# Altium PCB amplifier.PcbDoc
Units mm, origin at the board's own origin, x right, y up, seen from the top; angles counter-clockwise.
Board outline 75 x 50 mm, 2 copper layers (Top Layer, Bottom Layer), stack 1.671 mm thick; 10 components, 10 nets, 28 pads, 7 vias.
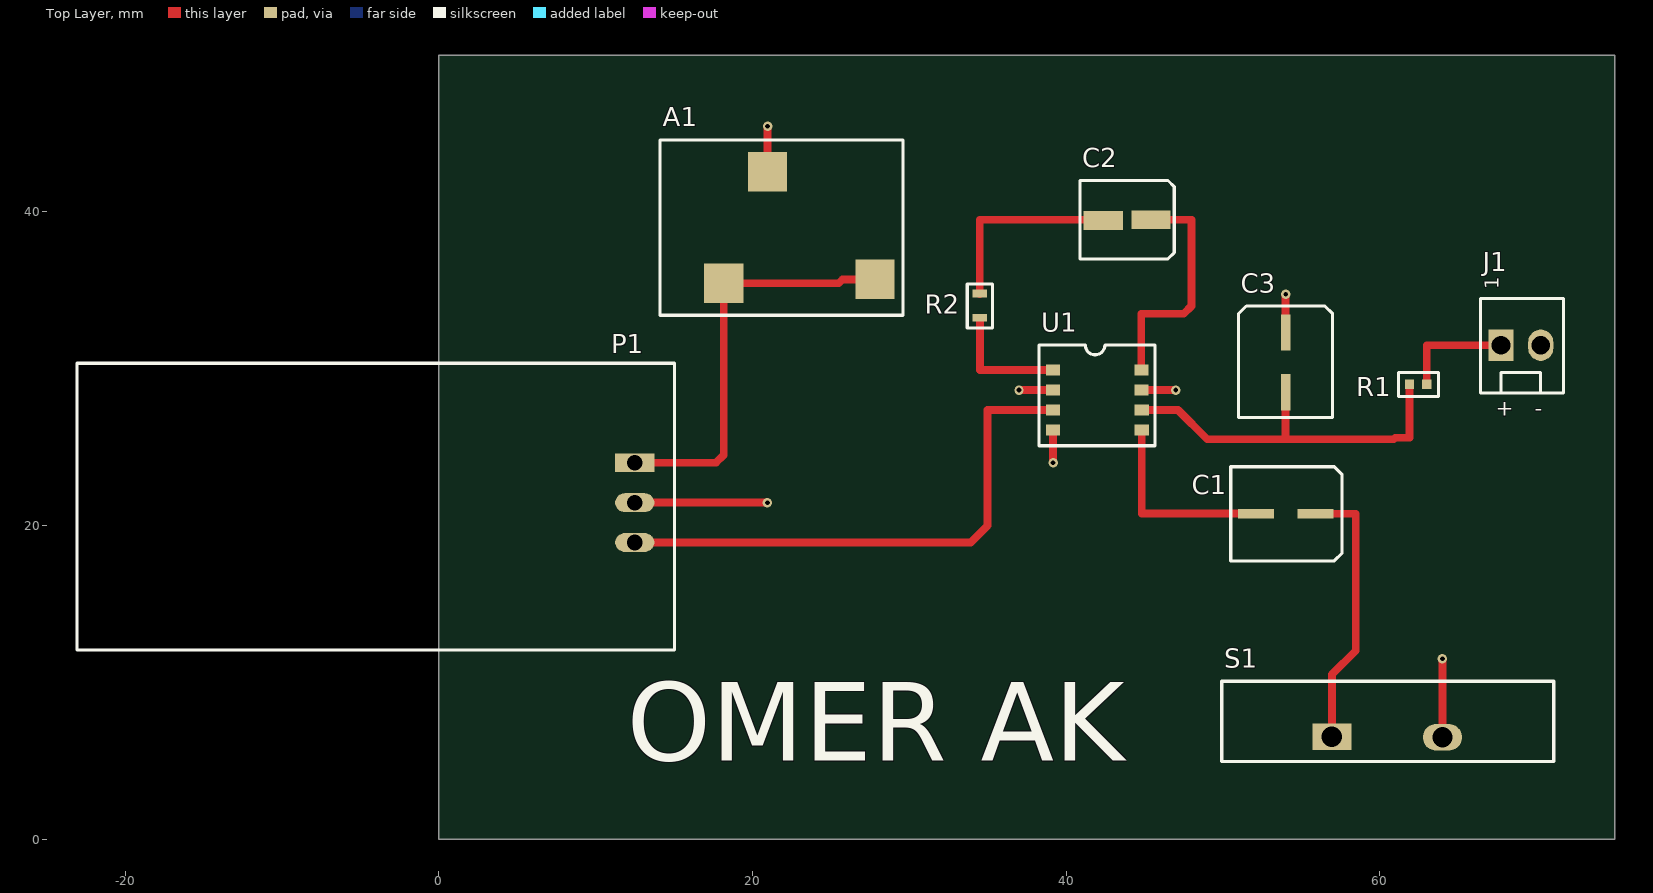
[diagram p0: Top Layer view]
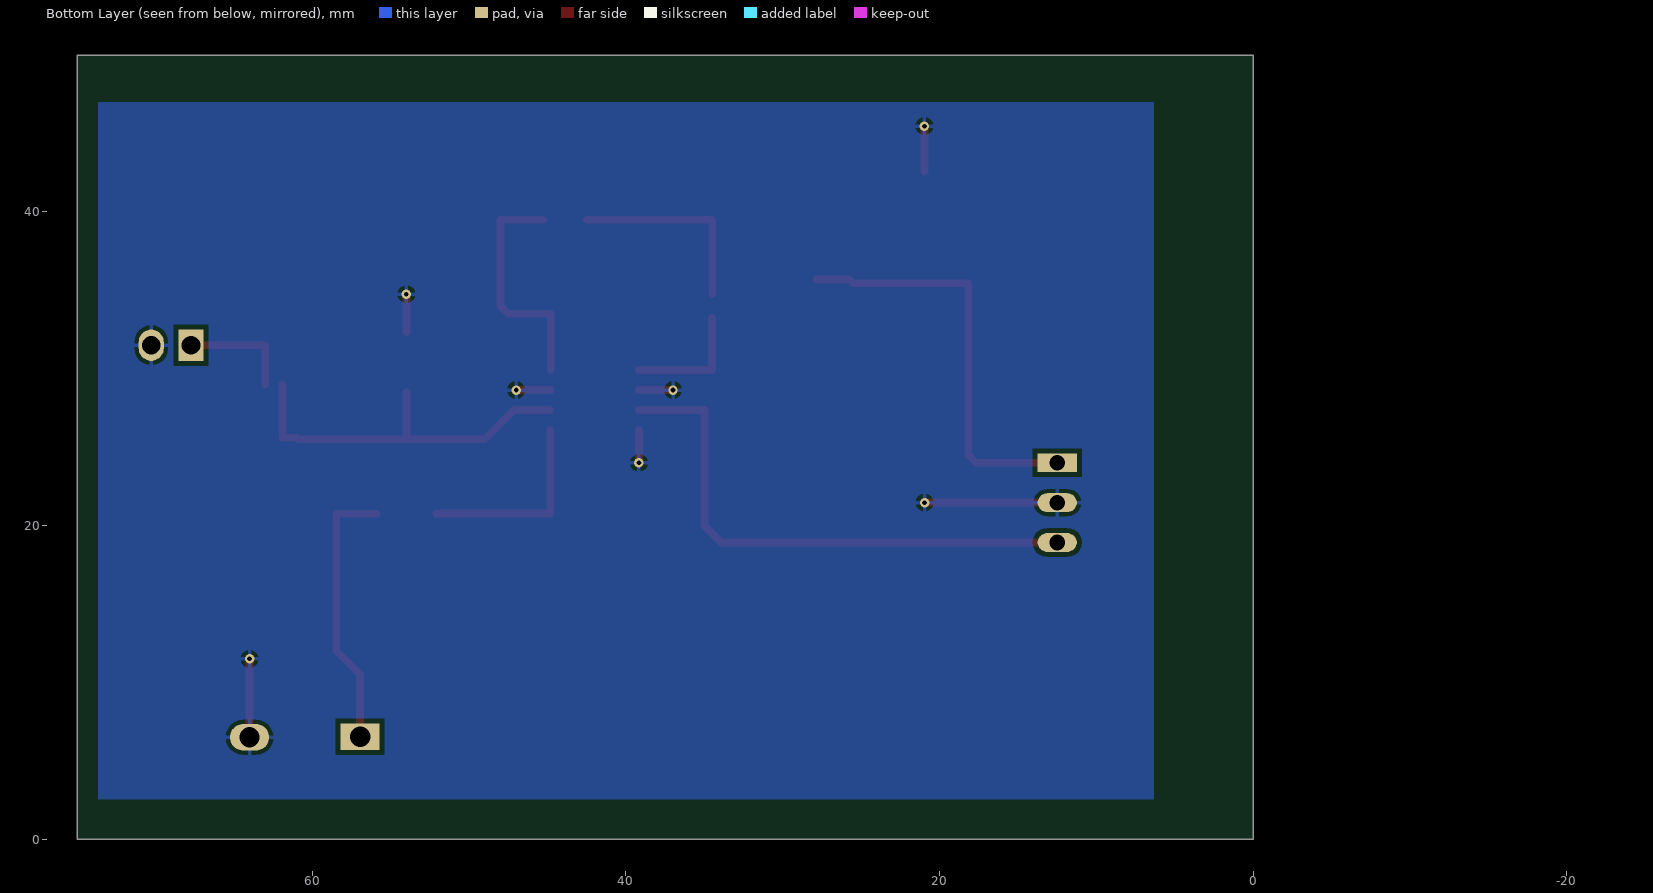
[diagram p1: Bottom Layer view, seen from below]
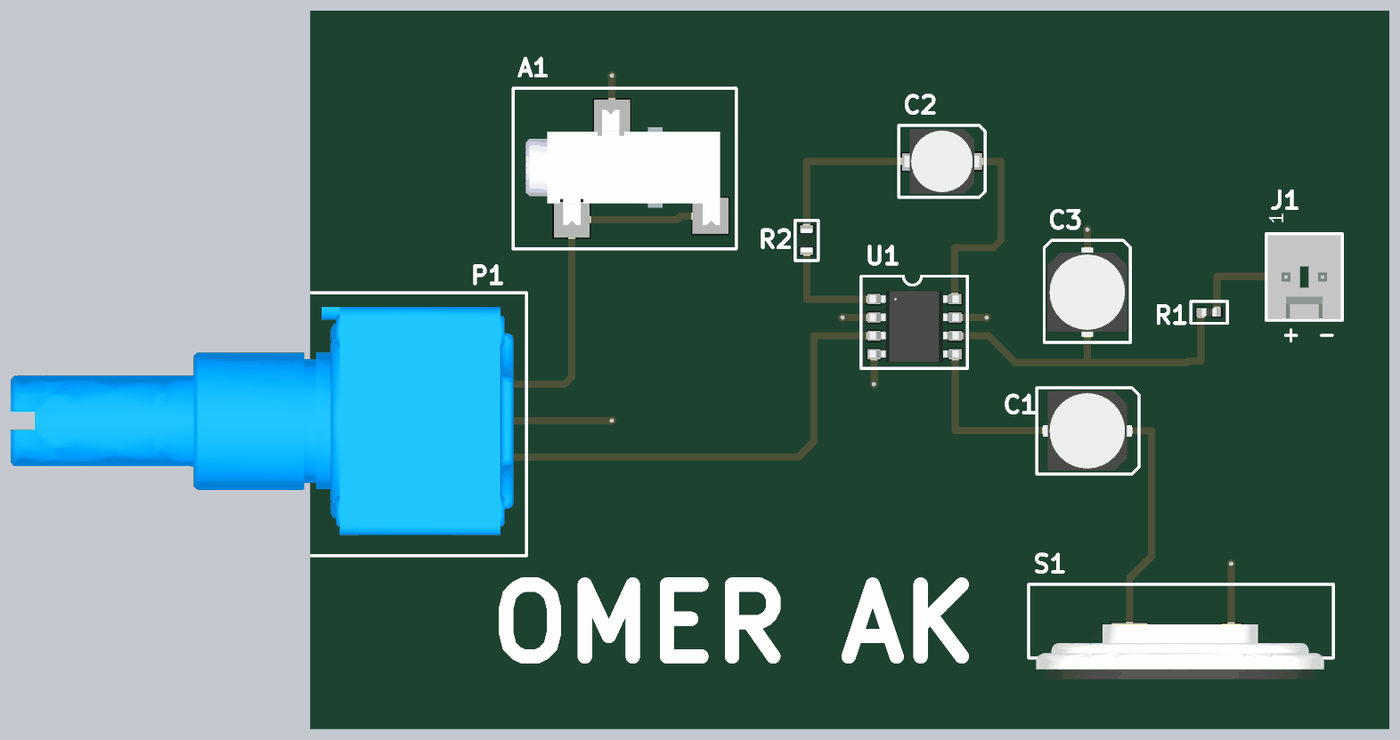
[diagram p2: 3D render of the assembled board from above, using the file's embedded part models]

## Layer stack, top to bottom
Top Solder: solder mask 0.0102, Solder Resist, Dk 3.5
Top Layer: signal copper 0.0356
Dielectric 1: dielectric 1.6, FR-4, Dk 4.8
Bottom Layer: signal copper 0.0356
Bottom Solder: solder mask 0.0102, Solder Resist, Dk 3.5

## Board outline
75,50 0,50 0,0 75,0

## Design rules (kind name [scope] priority, off if disabled: settings)
Clearance [All] p1: gap=0.3 ignorepadtopadclearanceinfootprint=FALSE
PolygonConnect [All] p1: connectstyle=Relief reliefconductorwidth=0.254 reliefentries=4 polygonreliefangle="90 Angle" airgapwidth=0.254
RoutingVias [All] p1: holewidth=0.3 width=0.6 viastyle="Through Hole" minholewidth=0.3 minwidth=0.6 maxholewidth=0.3 maxwidth=0.6
SilkToSilkClearance [All] p1: silktosilkclearance=0.1
SilkToSolderMaskClearance [IsPad] p1: minsilkscreentomaskgap=0.1 clearancetoexposedcopper=TRUE
SolderMaskExpansion [All] p1: expansion=0.102
Width [All] p1: maxlimit=1 minlimit=0.3 preferedwidth=0.5
28 further rules are at their usual default settings.

## Components (designator, comment, footprint, x,y, rotation, side; value= is the part's Value field where it differs from the comment)
A1 "Jack" SJ252 23,39 r90 top
C1 "220uF" C6SVPE 54,20.75 r0 top
C2 "10uF" C10SVP 43.9,39.5 r0 top
C3 "220uF" C6SVPE 54,30.4 r90 top
J1 "1x2 Header" HDR1X2 69,31.5 r90 top
P1 "10k" 91A1A 12.5,21.46 r0 top
R1 "10ohm" R0402 62.475,29 r0 top
R2 "1kohm" R0603 34.5,34 r270 top
S1 "250mW" CLF038 60.5,6.5 r0 top
U1 "Lm386" LM386MX 42,28 r0 top

## Footprints (in the part's own frame and the unit in brackets; to place one, negate y for a bottom-side part, rotate by r counter-clockwise, add the part's x,y. Pads: shape width x height; smd on the part's side, far side on the other; paste and mask are expansions set on the pad)
91A1A [mm]
  rect 2.5x1.2 hole 1: 1(0,2.54)
  oval 2.5x1.2 hole 1: 2(0,0) 3(0,-2.54)
  silkscreen extent -35.56,-9.4 2.54,8.89, body extent -33.3,-7.96 1.63,7.91, height 17.46
C6SVPE [mm]
  rect 2.3x0.6 smd: 1(-1.9,0) 2(1.9,0)
  silkscreen extent -3.5,-3 3.6,3, body extent -3.1,-2.76 3.1,2.76, height 6.04
C10SVP [mm]
  rect 2.5x1.2 smd: 1(-1.525,-0.05) 2(1.525,0)
  silkscreen extent -3,-2.5 3,2.5, body extent -2.6,-2.25 2.6,2.25, height 5.56
CLF038 [mm]
  rect 2.5x1.7 hole 1.3: 1(-3.55,0.025)
  oval 2.5x1.7 hole 1.3: 2(3.5,0)
  silkscreen extent -10.58,-1.55 10.6,3.57, body extent -10.05,-3.03 9.95,0.77, height 21
HDR1X2 [mm]
  rect 2x1.6 hole 1.2: 1(0,1.27)
  oval 2x1.6 hole 1.2: 2(0,-1.27)
  silkscreen extent -3.05,-2.73 2.98,2.58, body extent -2.93,-2.61 2.87,2.47, height 11.71
LM386MX [mm]
  rect 0.9x0.7 smd: 1(-2.825,1.913) 2(-2.825,0.638) 3(-2.825,-0.637) 4(-2.825,-1.912) 5(2.825,-1.912) 6(2.825,-0.637) 7(2.8,0.638) 8(2.8,1.913)
  silkscreen extent -3.72,-2.91 3.68,3.51, body extent -3.12,-2.49 3.07,2.51, height 1.76
R0402 [mm]
  rect 0.6x0.6 smd: 1(-0.575,0) 2(0.525,0)
  silkscreen extent -1.27,-0.76 1.27,0.76, body extent -0.52,-0.28 0.52,0.28, height 0.41
R0603 [mm]
  rect 0.5x0.9 smd: 1(-0.8,0) 2(0.75,0)
  silkscreen extent -1.4,-0.8 1.4,0.8, body extent -0.8,-0.4 0.8,0.4, height 0.46
SJ252 [mm]
  rect 2.5x2.5 smd: 1(-3.556,4.826) 2(-3.302,-4.826) 3(3.556,2.032)
  silkscreen extent -5.59,-6.6 5.59,8.89, body extent -3.92,-5.48 4.08,8.02, height 4.51

## Part data
A1: library part SJ-2523-SMT-TR, "2.50mm (0.094\", 3/32\", Sub Mini, Miniature) - Headphone Phone Jack Stereo Connector Solder", Case/Package=SMD/SMT, Current Rating=1A, Manufacturer=CUI, Supplier Part Number 1=CP-2523SJDKR-ND, Category=Connectors, ComponentLink1Description=https://www.cui.com/product/resource/digikeypdf/sj-252x-smt_series.pdf, ComponentLink1URL=https://www.cui.com/product/resource/digikeypdf/sj-252x-smt_series.pdf, Contact Plating=Silver, Gender=Female, Lead Free="Lead Free", Manufacturer Part Number=SJ-2523-SMT-TR, Mount="Surface Mount", Packaging="Cut Tape", Pricing 1="1=0.96, 10=0.842, 25=0.792, 50=0.759, 100=0.726, 250=0.66, 500=0.594 (USD)", Shielding=Unshielded, Stock 1=99414, Supplier 1=Digi-Key, Termination=Solder
C1 C3: library part 6SVPE220MW, "Cap Aluminum Polymer 220uF 6.3VDC 20% (5 X 5.9mm) SMD 0.015 Ohm 3150mA 2000h 105C T/R", Case/Package=Radial, ESR (Equivalent Series Resistance)=15mR, Leakage Current=500uA, Manufacturer=Panasonic, Max Operating Temperature=105°C, Min Operating Temperature=-55°C, Package Quantity=1500, Ripple Current=3.15A, Supplier Part Number 1=P16836DKR-ND, Tolerance=20%, Voltage=6.3V, Capacitance=220uF, Category=Capacitors, ComponentLink1Description=http://www.farnell.com/datasheets/1734359.pdf, ComponentLink1URL=http://www.farnell.com/datasheets/1734359.pdf, ComponentLink2Description=http://www.farnell.com/datasheets/2059644.pdf, ComponentLink2URL=http://www.farnell.com/datasheets/2059644.pdf, Diameter=5mm, Dissipation Factor=12%, Height=5.9mm, Height - Seated (Max)=0.236inch, Lead Free="Lead Free", Length=5.9mm, Life (Hours)=2000Hour, Manufacturer Part Number=6SVPE220MW, Mount="Surface Mount", Number of Pins=6, Packaging="Tape and Reel", Polarity=Polar, Pricing 1="1=0.68, 10=0.503, 100=0.3452, 500=0.27326 (USD)", REACH SVHC="No SVHC", Ripple Current (AC)=3.15A, Stock 1=8702, Supplier 1=Digi-Key, Termination=SMD/SMT, Voltage Rating=6.3V, Voltage Rating (DC)=6.3V
C2: library part 10SVP10M, "CAP POLYMER 10UF 20% 10V SMD", Case/Package=Radial, ESR (Equivalent Series Resistance)=220mR, Leakage Current=50uA, Manufacturer=Panasonic, Max Operating Temperature=105°C, Min Operating Temperature=-55°C, Package Quantity=1, Ripple Current=700mA, Supplier Part Number 1=P16427DKR-ND, Tolerance=20%, Voltage=10V, Capacitance=10uF, Category=Capacitors, Diameter=4mm, Dissipation Factor=10%, Height=5.4mm, Height - Seated (Max)=0.217inch, Lead Free="Lead Free", Length=5.4mm, Life (Hours)=2000Hour, Manufacturer Part Number=10SVP10M, Material=Polymer, Mount="Surface Mount", Number of Pins=5, Packaging="Tape and Reel", Polarity=Polar, Pricing 1="1=1.11, 10=0.874, 100=0.6556, 500=0.49532, 1000=0.43705 (USD)", Radiation Hardening=No, REACH SVHC="No SVHC", Ripple Current (AC)=700mA, Stock 1=5849, Supplier 1=Digi-Key, Termination=SMD/SMT, Voltage Rating=10V, Voltage Rating (DC)=10V
J1: library part 22-29-2021, "Headers & Wire Housings 2 PIN F/LK HEADER", Color=White, Contact Resistance=10mR, Current Rating=4A, Flammability Rating="UL94 V-0", Manufacturer=Molex, Max Operating Temperature=75°C, Max Voltage Rating (AC)=250V, Min Operating Temperature=0°C, Package Quantity=2500, Supplier Part Number 1=WM2744-ND, Category=Connectors, ComponentLink1Description=http://www.jameco.com/Jameco/Products/ProdDS/879588.pdf, ComponentLink1URL=http://www.jameco.com/Jameco/Products/ProdDS/879588.pdf, ComponentLink2Description=http://uk.rs-online.com/webdocs/13c2/0900766b813c2e8d.pdf, ComponentLink2URL=http://uk.rs-online.com/webdocs/13c2/0900766b813c2e8d.pdf, ComponentLink3Description=http://www.mouser.com/ds/2/276/0022292021_PCB_HEADERS-159390.pdf, ComponentLink3URL=http://www.mouser.com/ds/2/276/0022292021_PCB_HEADERS-159390.pdf, ComponentLink4Description=http://www.molex.com/webdocs/datasheets/pdf/en-us/0022292021_PCB_HEADERS.pdf, ComponentLink4URL=http://www.molex.com/webdocs/datasheets/pdf/en-us/0022292021_PCB_HEADERS.pdf, Contact Material=Brass, Contact Plating=Gold, Depth=5.8mm, Gender=Male, Glow Wire Compliant=Non-compliant, Halogen Free="Low Halogen", Height=11.7mm, Housing Color=White, Housing Material=Nylon, Lead Free="Lead Free", Length=12.7mm, Manufacturer Part Number=22-29-2021, Max Current Rating=4A, Mount="Through Hole", Number of Circuits=2, Number of Contacts=2, Number of Positions=2, Number of Rows=1, Orientation=Straight, Packaging=Bulk, Pitch=2.54mm, Pricing 1="1=0.48, 10=0.452, 100=0.3163, 500=0.27112, 1000=0.22593, 5000=0.19365, 10000=0.18074 (USD)", Radiation Hardening=No, REACH SVHC=Unknown, Stock 1=11534, Supplier 1=Digi-Key, Termination="Through Hole", Voltage Rating=250V, Voltage Rating (DC)=250V
P1: library part 91A1A-B28-B15L, "BOURNS   91A1A-B28-B15L   Rotary Potentiometer, Conductive Plastic, 91 Series, 10 kohm, Linear, 1 Turns, 1 W, Through Hole", Manufacturer=Bourns, Max Operating Temperature=125°C, Max Power Dissipation=1W, Min Operating Temperature=-40°C, Package Quantity=5, Ratings=IP40, Resistance=10kR, Supplier Part Number 1=91A1A-B28-B15L-ND, Temperature Coefficient=1000ppm/°C, Tolerance=20%, Voltage Rating (AC)=350V, Voltage Rating (DC)=500V, Actuator Diameter=0.25inch, Actuator Length=0.875inch, Category=Potentiometers, ComponentLink1Description=https://www.verical.com/server-webapp/html/getDatasheet?partID=30645, ComponentLink1URL=https://www.verical.com/server-webapp/html/getDatasheet?partID=30645, ComponentLink2Description=http://uk.rs-online.com/webdocs/06d6/0900766b806d6d25.pdf, ComponentLink2URL=http://uk.rs-online.com/webdocs/06d6/0900766b806d6d25.pdf, ComponentLink3Description=https://www.bourns.com/docs/Product-Datasheets/91_95.pdf, ComponentLink3URL=https://www.bourns.com/docs/Product-Datasheets/91_95.pdf, ComponentLink4Description=https://www.distrelec.biz/Web/Downloads/_t/ds/91-95-series_eng_tds.pdf?mime=application%2Fpdf, ComponentLink4URL=https://www.distrelec.biz/Web/Downloads/_t/ds/91-95-series_eng_tds.pdf?mime=application%2Fpdf, ComponentLink5Description=http://components.arrow.com/part/dataview/42911771S9459740N1506, ComponentLink5URL=http://components.arrow.com/part/dataview/42911771S9459740N1506, Composition="Conductive Plastic", Contact Plating=Tin, Depth=15.88mm, Height=17.47mm, Hole Diameter=9.525mm, Lead Free="Lead Free", Length=34.93mm, Linearity=5%, Manufacturer Part Number=91A1A-B28-B15L, Military Standard=Not, Mount="Panel,Through Hole", Number of Gangs=1, Number of Turns=1, Packaging=Bulk, Power Rating=1W, Pricing 1="1=5.91, 10=5.418, 25=4.8264, 50=4.531, 100=4.137, 250=3.349, 500=3.152, 1000=2.955 (USD)", Radiation Hardening=No, REACH SVHC="No SVHC", Stock 1=9322, Supplier 1=Digi-Key, Taper=Linear, Termination=Pin, Type=Potentiometer, Weight=12.7g, Width=15.88mm
R1: library part CRCW040210R0FKEDHP, "Thick Film Resistors 0.2W 10ohms 1% High Power AEC-Q200", Case/Package=0402, Case Code (Metric)=1005, Manufacturer="Vishay Dale", Max Operating Temperature=155°C, Min Operating Temperature=-55°C, Package Quantity=10000, Power Rating=125mW, Resistance=10R, Supplier Part Number 1=541-10.0YDKR-ND, Temperature Coefficient=100ppm/°C, Tolerance=1%, Voltage Rating=50V, Case Code (Imperial)=0402, Category=Resistors, ComponentLink1Description=http://www.mouser.com/ds/2/427/crcwhpe3-46056.pdf, ComponentLink1URL=http://www.mouser.com/ds/2/427/crcwhpe3-46056.pdf, Composition="Thick Film", Contact Plating=Tin, Depth=0.5mm, Height=0.3mm, Lead Free="Lead Free", Length=1mm, Manufacturer Part Number=CRCW040210R0FKEDHP, Military Standard=Not, Mount="Surface Mount", Packaging="Tape and Reel", Pricing 1="1=0.15, 10=0.138, 100=0.0532, 1000=0.02343, 2500=0.02023, 5000=0.0181 (USD)", Radiation Hardening=No, REACH SVHC=Unknown, Stock 1=27988, Supplier 1=Digi-Key, Termination=SMD/SMT, Voltage Rating (DC)=50V, Weight=2.3E-05oz, Width=0.5mm
R2: library part TNPU06031K00BZEN00, "Thin Film Resistors - SMD 1/10watt 1Kohms 0.1% 5ppm", Case/Package=0603, Case Code (Metric)=1608, Manufacturer="Vishay Dale", Max Operating Temperature=125°C, Max Power Dissipation=100mW, Min Operating Temperature=-55°C, Package Quantity=1, Resistance=1kR, Supplier Part Number 1=TNPU1.00KBADKR-ND, Temperature Coefficient=5ppm/°C, Tolerance=0.1%, Voltage Rating=75V, Case Code (Imperial)=0603, Category=Resistors, ComponentLink1Description=http://www.vishay.com/docs/28779/tnpue3.pdf, ComponentLink1URL=http://www.vishay.com/docs/28779/tnpue3.pdf, ComponentLink2Description=http://uk.rs-online.com/webdocs/0d9a/0900766b80d9a43e.pdf, ComponentLink2URL=http://uk.rs-online.com/webdocs/0d9a/0900766b80d9a43e.pdf, Composition="Thin Film", Depth=0.85mm, Features="Anti-Sulfur,Automotive AEC-Q200,Moisture Resistant", Height=0.45mm, Lead Free="Lead Free", Length=1.6mm, Manufacturer Part Number=TNPU06031K00BZEN00, Number of Pins=2, Number of Terminations=2, Packaging="Tape and Reel", Power Rating=100mW, Pricing 1="1=2.45, 10=2.176, 100=1.6617 (USD)", Radiation Hardening=No, REACH SVHC=Unknown, Stock 1=22594, Supplier 1=Digi-Key, Termination=SMD/SMT, Voltage Rating (DC)=75V, Width=0.033inch
S1: library part CLF0381MP-1, "8 Ohm Magnetic Speaker 250mW 380Hz ~ 10kHz Top Round 93dB", Manufacturer=CUI, Max Power Dissipation=400mW, Resistance=8R, Supplier Part Number 1=102-1549-ND, Category=Audio, Height=9.7mm, Impedance=8R, Lead Free="Lead Free", Manufacturer Part Number=CLF0381MP-1, Power Rating=250mW, Pricing 1="1=3.56, 10=2.818, 25=2.572, 50=2.4024, 100=2.233, 250=2.0482, 500=2.002 (USD)", Shape=Round, Stock 1=7807, Supplier 1=Digi-Key, Termination="PC Pins"
U1: library part LM386MX-1/NOPB, "TEXAS INSTRUMENTS   LM386MX-1/NOPB   AUDIO POWER AMPLIFIER, CLASS AB 325mW SOIC-8", Case/Package=D, Input Bias Current=250nA, Manufacturer="TI National Semiconductor", Max Operating Temperature=70°C, Max Output Power=325mW, Max Power Dissipation=730mW, Max Supply Voltage=12V, Min Operating Temperature=0°C, Min Supply Voltage=4V, Nominal Supply Current=4mA, Operating Supply Voltage=9V, Package Quantity=2500, Power Supply Rejection Ratio (PSRR)=50dB, Supplier Part Number 1=LM386MX-1/NOPBDKR-ND, Voltage Gain=46dB, Bandwidth=300kHz, Category=Integrated, ComponentLink1Description=http://www.farnell.com/datasheets/1640767.pdf, ComponentLink1URL=http://www.farnell.com/datasheets/1640767.pdf, ComponentLink2Description=http://www.ti.com/general/docs/lit/getliterature.tsp?genericPartNumber=LM386&&fileType=pdf, ComponentLink2URL=http://www.ti.com/general/docs/lit/getliterature.tsp?genericPartNumber=LM386&&fileType=pdf, ComponentLink3Description=http://www.jameco.com/Jameco/Products/ProdDS/1282302.pdf, ComponentLink3URL=http://www.jameco.com/Jameco/Products/ProdDS/1282302.pdf, ComponentLink4Description=https://www.verical.com/server-webapp/html/getDatasheet?partID=145250, ComponentLink4URL=https://www.verical.com/server-webapp/html/getDatasheet?partID=145250, ComponentLink5Description=http://www.ti.com/lit/ds/symlink/lm386.pdf, ComponentLink5URL=http://www.ti.com/lit/ds/symlink/lm386.pdf, Contact Plating=Matte,Tin, Gain=20dB, Lead Free="Lead Free", Load Impedance=8R, Manufacturer Part Number=LM386MX-1/NOPB, Number of Channels=1, Number of Pins=8, Output Power=325mW, Packaging="Tape and Reel", Power Dissipation=730mW, Pricing 1="1=0.91, 10=0.814, 100=0.6349, 500=0.52448, 1000=0.41406 (USD)", Radiation Hardening=No, REACH SVHC="No SVHC", Stock 1=22596, Supplier 1=Digi-Key, Supply Type=Single

## Via types
v1: diameter 0.6, hole 0.3, Top Layer to Bottom Layer, tented both sides, 7 vias

## Nets (pads, with @x,y where several pads share a name; then routed paths per layer and width w, separated by ;. In a path a pad name is that pad's centre, name@x,y a point inside that pad or via, vN(x,y) a via of type N, cw(c..) or ccw(c..) an arc to the next point about the centre after c; other vN are vias at no path point)
10k: P1.3 U1.3 | length 34.5
  Top Layer w0.5: P1.3 33.92,18.92 35,20 35,27.363 U1.3
+10V: J1.1 R1.2 | length 7.2
  Top Layer w0.5: R1.2 63,31.5 J1.1
C1: C1.1 U1.5 | length 12.6
  Top Layer w0.5: U1.5 44.825,20.775 52.075,20.775 C1.1
C2: C2.2 U1.8 | length 15.2
  Top Layer w0.5: U1.8 44.8,33.5 47.5,33.5 48,34 48,39.5 C2.2@45.3,39.5
GND: A1.3 C3.2 J1.2 P1.2 S1.2 U1.2 U1.4 U1.7 | length 25.3
  Top Layer w0.5: P1.2 v1(20.96,21.46) ; A1.3 v1(20.968,45.468) ; v1(37,28.638) U1.2 ; v1(39.175,24) U1.4 ; U1.7 v1(47,28.638) ; C3.2 v1(54,34.75) ; S1.2 v1(64,11.5)
Jack: A1.1 A1.2 P1.1 | length 26.6
  Top Layer w0.5: P1.1 17.674,24 18.174,24.5 A1.1 25.5,35.444 25.754,35.698 A1.2
NetC3_1: C3.1 R1.1 U1.6 | length 24.3
  Top Layer w0.5: U1.6 47.137,27.363 49,25.5 54,25.5 ; C3.1 54,25.5 ; R1.1 61.9,25.6 61,25.6 60.9,25.5 54,25.5
NetR2_2: R2.2 U1.1 | length 8
  Top Layer w0.5: R2.2 34.51,33.24 34.51,29.913 U1.1
R2: C2.1 R2.1 | length 12.7
  Top Layer w0.5: R2.1@34.5,34.75 34.5,39.5 C2.1@42.5,39.5
Speakers: C1.2 S1.1 | length 17.4
  Top Layer w0.5: C1.2 58.475,20.75 58.475,12.025 56.95,10.5 S1.1

## Polygon pours and split planes (outlines as drawn)
GND on Bottom Layer (solid, pour order 34): 6.35,46.99 73.66,46.99 73.66,2.54 6.35,2.54
GND on Bottom Layer (solid, pour order 2): 5,49
GND on Top Layer (solid, pour order 6): 55.5,39.5

## Silkscreen, mask and mechanical layers (free items; w line width, h text height)
Top Overlay:
  text "+" at 67.4,27 h1
  text "-" at 69.9,27 h1
  text "OMER AK" at 12,5 h5
BoardOutLine:
  the board outline again, w0.2

## Text inside footprints (layer, text, board x,y; h text height)
J1: Mechanical 29 "1" at 67.575,35.075 h0.9 r90; Top Overlay "1" at 67.575,35.075 h0.9 r90